# EAGLE board PCB (EAGLE 6.3)
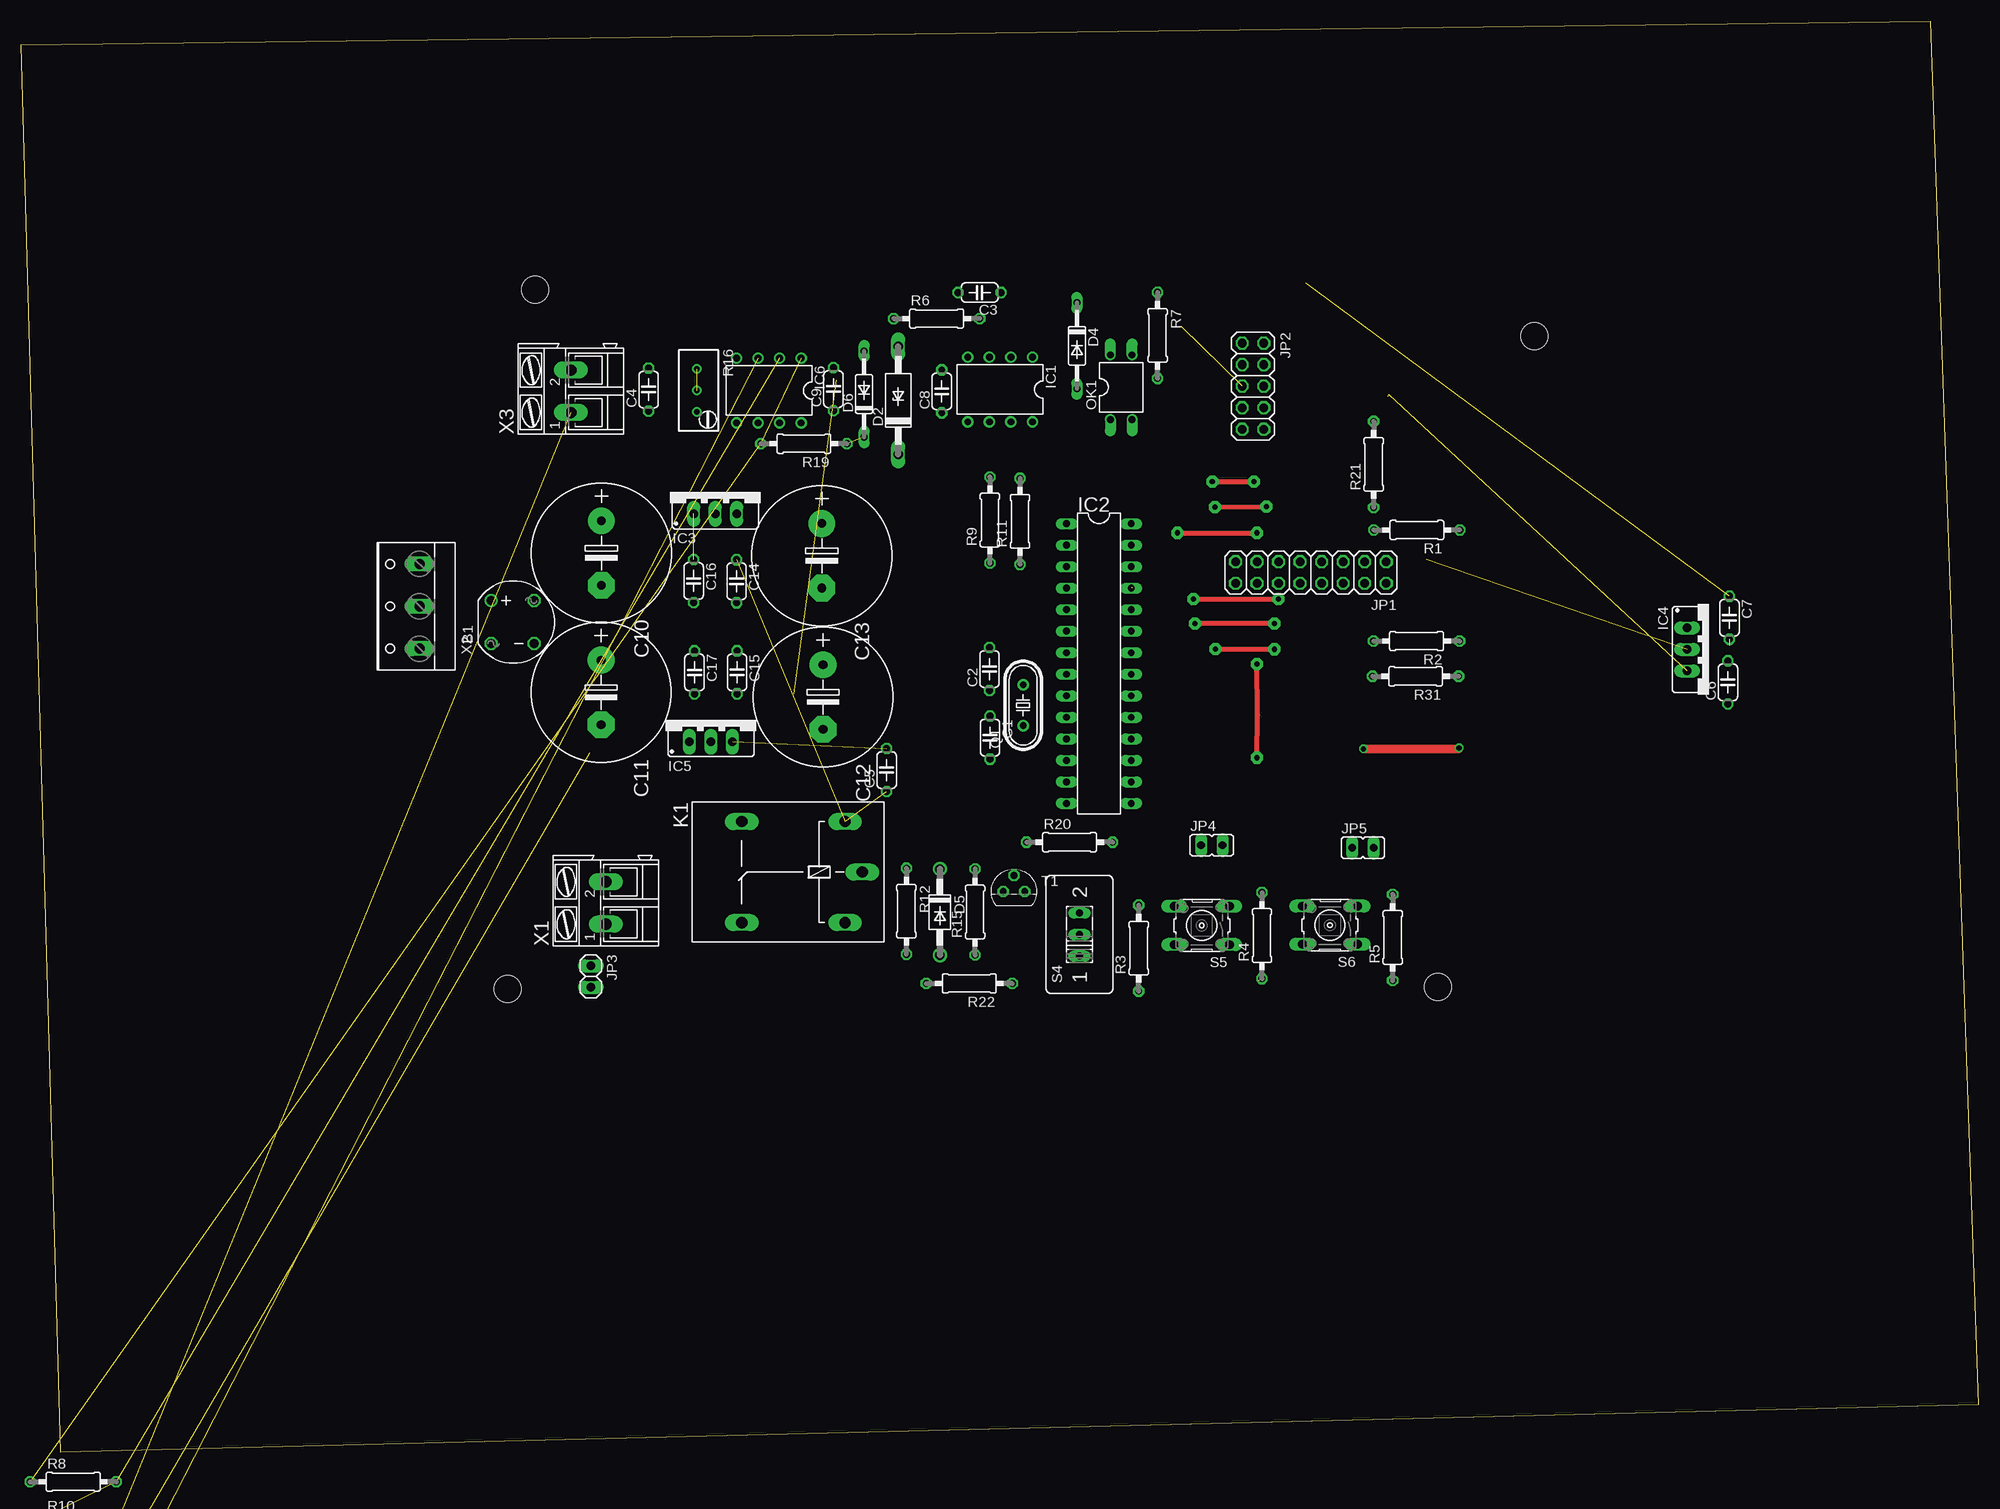
[diagram p0: board, top side]
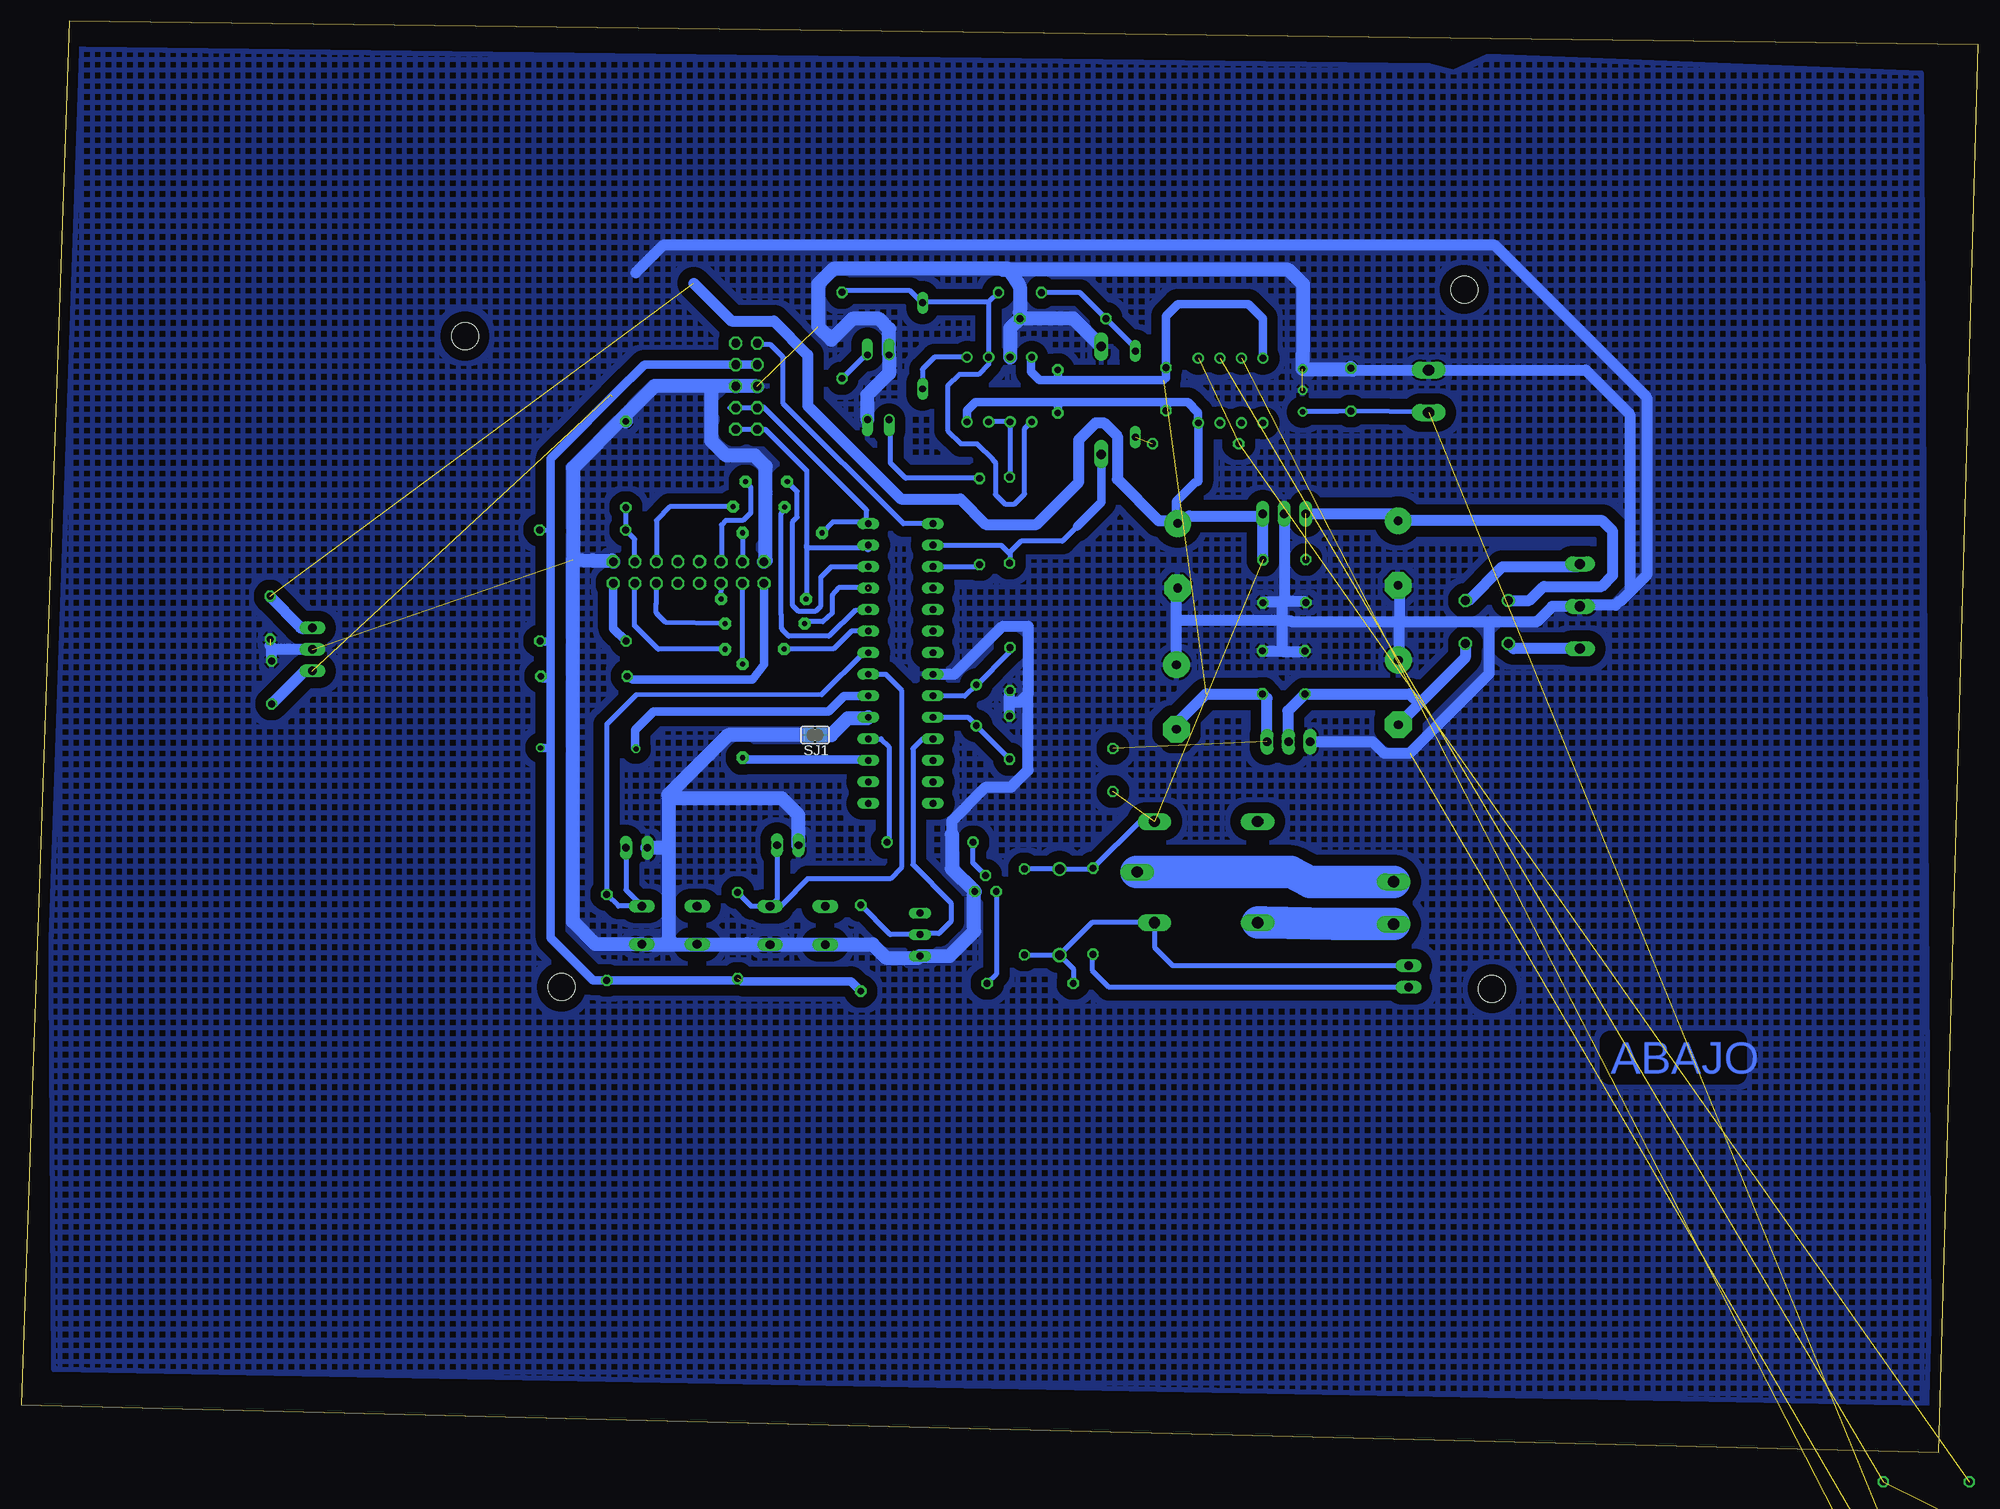
[diagram p1: board, bottom side, seen from below]

Size 230.97 x 168.91 mm. Coordinates in mm from the lower left corner, seen from the top.
Outline: 230.97,5.6 4.64,0 0,166.12 225.31,168.91 230.97,5.6
Copper layers (1*16): Top 0.035mm / dielectric 1.5mm / Bottom 0.035mm
Design rules "default *": minimum track width 20mil, minimum drill 24mil, track to track 15mil, track to pad 15mil, pad to pad 15mil, via to via 15mil, smd to smd 8mil, copper to edge 40mil, drill to drill 8mil, minimum pad ring 10mil, minimum via ring 8mil, stop-mask expansion 4mil, vias tented up to drill 0mil, thermal gap 10mil
Holes 3.2 mm at 167.22,54.93 178.6,131.74 60.68,137.24 57.39,54.71

## Footprints (pad centres in the part's own frame; a part is rotated, then mirrored left to right if it is on the bottom)
RB1A = drill 1.016: + -2.54,2.54 | drill 1.016 octagon: - 2.54,-2.54; AC1 2.54,2.54; AC2 -2.54,-2.54
C050-024X044 = drill 0.813 octagon: 1 -2.54,0; 2 2.54,0
E7,5-16 = drill 1.016 pad 3.15: + -3.81,0 | drill 1.016 pad 3.15 octagon: - 3.81,0
P1Z12 = drill 1.118 long: A 6.35,0; C -6.35,0
DO35-10 = drill 0.813 long: A 5.08,0; C -5.08,0
DO41-10 = drill 1.118: A 5.08,0; C -5.08,0
DIL08 = drill 0.813 pad 1.27: 1 -3.81,-3.81; 2 -1.27,-3.81; 3 1.27,-3.81; 4 3.81,-3.81; 5 3.81,3.81; 6 1.27,3.81; 7 -1.27,3.81; 8 -3.81,3.81
DIL28-3 = drill 0.813 long: 1 -16.51,-3.81; 2 -13.97,-3.81; 3 -11.43,-3.81; 4 -8.89,-3.81; 5 -6.35,-3.81; 6 -3.81,-3.81; 7 -1.27,-3.81; 8 1.27,-3.81; 9 3.81,-3.81; 10 6.35,-3.81; 11 8.89,-3.81; 12 11.43,-3.81; 13 13.97,-3.81; 14 16.51,-3.81; 15 16.51,3.81; 16 13.97,3.81; 17 11.43,3.81; 18 8.89,3.81; 19 6.35,3.81; 20 3.81,3.81; 21 1.27,3.81; 22 -1.27,3.81; 23 -3.81,3.81; 24 -6.35,3.81; 25 -8.89,3.81; 26 -11.43,3.81; 27 -13.97,3.81; 28 -16.51,3.81
78XXS = drill 1.016 long: GND 0,-2.54; IN -2.54,-2.54; OUT 2.54,-2.54
79XXS = drill 1.016 long: GND -2.54,-2.54; IN 0,-2.54; OUT 2.54,-2.54
2X08 = drill 1.016 octagon: 1 -8.89,-1.27; 2 -8.89,1.27; 3 -6.35,-1.27; 4 -6.35,1.27; 5 -3.81,-1.27; 6 -3.81,1.27; 7 -1.27,-1.27; 8 -1.27,1.27; 9 1.27,-1.27; 10 1.27,1.27; 11 3.81,-1.27; 12 3.81,1.27; 13 6.35,-1.27; 14 6.35,1.27; 15 8.89,-1.27; 16 8.89,1.27
2X05 = drill 1.016 octagon: 1 -5.08,-1.27; 2 -5.08,1.27; 3 -2.54,-1.27; 4 -2.54,1.27; 5 0,-1.27; 6 0,1.27; 7 2.54,-1.27; 8 2.54,1.27; 9 5.08,-1.27; 10 5.08,1.27
1X02 = drill 1.016 long: 1 -1.27,0; 2 1.27,0
JP1 = drill 0.914 long: 1 0,-1.27; 2 0,1.27
G5LE = drill 1.321 long: 1 -7.493,-5.969; 2 -7.493,5.969; O 4.699,5.969; P -9.525,0; S 4.699,-5.969
DIL04 = drill 0.813 offset: 1 -1.27,-3.81; 2 1.27,-3.81; 3 1.27,3.81; 4 -1.27,3.81
HC49/S = drill 0.813: 1 -2.413,0; 2 2.413,0
0207/10 = drill 0.813 octagon: 1 -5.08,0; 2 5.08,0
RTRIMT93YA = drill 0.61: 1 0,-2.54; 2 0,0; 3 0,2.54
M251 = drill 0.813 long: 1 -2.54,0; 2 0,0; 3 2.54,0
B3F-10XX = drill 1.016 long: 1 -3.251,2.261; 2 3.251,2.261; 3 -3.251,-2.261; 4 3.251,-2.261
SJ = smd 1.168 x 1.6: 1 -0.762,0; 2 0.762,0
TO92 = drill 0.813 octagon: 1 1.27,0; 2 0,1.905; 3 -1.27,0
AK300/2 = drill 1.321 long: 1 -2.515,0; 2 2.489,0
W237-103 = drill 1.194 long: 1 -5,-1.29; 2 0,-1.29; 3 5,-1.29

## Placement (x,y rotation side)
B1  Puente de 1A  [RB1A]  57.99,97.99 0 top
C1  27p  [C050-024X044]  114.33,84.35 270 top
C2  27p  [C050-024X044]  114.27,92.44 90 top
C3  22 nf  [C050-024X044]  113.11,136.89 180 top
C4  1 pf  [C050-024X044]  74.05,125.43 90 top
C5  100 nf  [C050-024X044]  102.14,80.52 90 top
C6  100 nf  [C050-024X044]  201.42,90.88 90 top
C7  330 nf  [C050-024X044]  201.6,98.5 270 top
C8  100 nf  [C050-024X044]  108.64,125.22 90 top
C9  100 nf  [C050-024X044]  95.86,125.48 90 top
C10  2200uf 25v  [E7,5-16]  68.47,106.13 270 top
C11  2200uf 25v  [E7,5-16]  68.44,89.69 270 top
C12  2200uf 25v  [E7,5-16]  94.63,89.13 270 top
C13  no  [E7,5-16]  94.49,105.81 270 top
C14  100 nf  [C050-024X044]  84.42,102.81 270 top
C15  100 nf  [C050-024X044]  84.48,92.06 270 top
C16  no  [C050-024X044]  79.36,102.84 270 top
C17  no  [C050-024X044]  79.45,92.05 270 top
D2  zener 5.1v  [P1Z12]  103.51,124.16 90 top
D4  1N4148DO35-10  [DO35-10]  124.6,130.6 270 top
D5  1N4001  [DO41-10]  108.43,63.76 270 top
D6  1N4148DO35-10  [DO35-10]  99.47,124.9 90 top
IC1  TL082  [DIL08]  115.52,125.43 180 top
IC2  PIC18F2550_28DIP  [DIL28-3]  127.19,93.1 270 top
IC3  7812  [78XXS]  81.91,113.31 0 top
IC4  7805  [78XXS]  199.16,94.76 270 top
IC5  7912  [79XXS]  81.4,86.42 0 top
IC6  TL082  [DIL08]  88.24,125.32 180 top
JP1  [2X08]  152.2,103.84 180 top
JP2  [2X05]  145.37,125.84 270 top
JP3  led  [1X02]  67.24,56.16 270 top
JP4  AUTOSET  [JP1]  140.5,71.66 270 top
JP5  RESET  [JP1]  158.34,71.36 270 top
K1  G5L  [G5LE]  89.74,68.48 180 top
OK1  LTV816  [DIL04]  129.82,125.71 0 top
Q1  20 mhz  [HC49/S]  118.25,88.18 90 top
R1  470  [0207/10]  164.71,108.86 180 top
R2  0  [0207/10]  164.67,95.75 180 top
R3  47k  [0207/10]  131.88,59.5 90 top
R4  47k  [0207/10]  146.43,60.99 90 top
R5  47k  [0207/10]  161.86,60.77 90 top
R6  10k  [0207/10]  108.03,133.81 0 top
R7  0  [0207/10]  134.11,131.83 270 top
R8  10k  [0207/10]  6.14,-3.48 0 top  (outside the outline)
R9  1k  [0207/10]  114.32,110.03 90 top
R10  10k  [0207/10]  6.14,-8.48 0 top  (outside the outline)
R11  680  [0207/10]  117.87,109.88 90 top
R12  1k  [0207/10]  104.46,63.87 270 top
R13  10k  [0207/10]  6.14,-13.48 0 top  (outside the outline)
R14  10k  [0207/10]  6.14,-18.48 0 top  (outside the outline)
R15  10k  [0207/10]  112.57,63.77 90 top
R16  1M  [RTRIMT93YA]  79.74,125.33 180 top
R19  100  [0207/10]  92.36,119.04 180 top
R20  4k7  [0207/10]  123.72,72.01 0 top
R21  330  [0207/10]  159.61,116.6 90 top
R22  100  [0207/10]  111.89,55.34 180 top
R31  470  [0207/10]  164.56,91.59 180 top
S4  PRESICION  [M251]  124.89,61.12 90 top
S5  AUTOSETEO  [B3F-10XX]  139.34,62.19 180 top
S6  RESET  [B3F-10XX]  154.45,62.22 180 top
SJ1  [SJ]  137.28,84.66 180 bottom
T1  BC548  [TO92]  117.16,66.18 0 top
X1  [AK300/2]  68.99,64.86 90 top
X2  FUENTE  [W237-103]  45.72,99.85 90 top
X3  [AK300/2]  64.87,125.24 90 top

## Library data of the parts
B1 = rectifier
C1-C17 = rcl
D2 D4-D6 = diode
IC1 IC6 = linear
IC2 = microchip
IC3-IC5 = v-reg
JP1-JP3 = pinhead
JP4 JP5 SJ1 = jumper
K1 = relay
OK1 = optocoupler; OC_FARNELL: unknown; OC_NEWARK: unknown
Q1 = crystal
R1-R16 R19-R22 R31 = resistor
S4 = switch
S5 S6 = switch-omron
T1 = transistor
X1 X3 = con-ptr500
X2 = con-wago-500

## Nets
+5V: C6.1 IC2.20 IC4.OUT JP2.3 JP2.4 R1.1 R2.1 R3.1 R4.1 R5.1 R31.1
+12V: C5.1 C7.1 C8.1 C9.1 C13.+ C14.1 D5.C IC1.8 IC3.OUT IC4.IN IC6.8 K1.1 R12.1 R15.2
-12V: C5.2 C8.2 C9.2 C12.- C15.2 IC1.4 IC5.OUT IC6.4
GND: C1.1 C2.1 C4.2 C6.2 C7.2 C10.- C11.+ C12.+ C13.- C14.2 C15.1 C16.2 C17.1 D2.A IC1.3 IC2.8 IC3.GND IC4.GND IC5.GND JP1.1 JP1.15 JP2.5 JP2.6 JP4.1 JP5.1 OK1.2 OK1.4 R6.2 R13.2 R14.1 R16.1 R16.2 R21.2 S4.1 S5.1 S6.1 SJ1.2 T1.1 X2.2 X3.2
N$1: IC6.3 R13.1 R14.2
N$2: JP1.3 R1.2 R21.1
N$3: D6.C R19.1
N$4: JP1.2 R2.2
N$5: JP1.16 R31.2
N$6: C3.2 D6.A R6.1
N$7: IC6.2 R8.2 R10.1
N$8: IC2.23 JP1.4
N$9: IC2.24 JP1.5
N$10: IC2.25 JP1.6
N$11: IC2.26 JP1.11
N$12: IC2.27 JP1.12 JP2.9 JP2.10
N$13: IC2.11 R3.2 S4.2
N$14: IC2.21 JP4.2 R4.2 S5.3
N$15: IC2.22 JP5.2 R5.2 S6.3
N$16: JP3.2 R12.2
N$17: IC2.28 JP1.13 JP2.7 JP2.8
N$18: IC2.19 SJ1.1
N$19: IC2.17 JP1.14
N$20: C3.1 D4.C IC1.2 IC1.5 R7.1
N$21: IC6.1 R8.1 R19.2
N$22: D4.A IC1.1
N$23: IC2.1 JP2.1
N$24: C2.2 IC2.9 Q1.2
N$25: C1.2 IC2.10 Q1.1
N$26: B1.+ C10.+ C16.1 IC3.IN
N$27: OK1.1 R11.2
N$28: OK1.3 R7.2
N$29: IC1.6 IC1.7 R9.2
N$30: K1.P X1.2
N$31: B1.- C11.- C17.2 IC5.IN
N$32: B1.AC2 X2.1
N$33: B1.AC1 X2.3
N$34: K1.O X1.1
N$35: IC2.18 R20.2
N$36: D5.A JP3.1 K1.2 R15.1 R22.2
N$39: D2.C IC2.2 R9.1
N$40: IC2.3 R11.1
N$45: R22.1 T1.3
N$51: C4.1 R10.2 R16.3 X3.1
N$55: R20.1 T1.2

## Tracks (layer width: path | path; a pad name or v marks a point on that pad's centre or on a via)
+5V  (via drill 0.6 pad 0.81)  (3 unrouted)
  Top 1.016: v158.42,83.02 169.58,83.02 v169.7,83.14
  Bottom 0.61: R1.1 168.66,108.86 168.48,108.68
  Bottom 1.016: 168.48,82.92 168.48,60.7 163.5,55.72 161.89,55.72 R5.1 146.03,55.69 145.94,55.6 133.06,55.6 R3.1 | 168.48,82.92 168.48,91.34 | 168.48,91.34 168.48,95.7 | IC2.20 131.03,89.26 133.84,89.26 135.66,87.44 156.34,87.44 158.54,85.24 158.54,83.14 v158.42,83.02 | R2.1 169.7,95.7 168.48,95.7 | R31.1 169.39,91.34 168.48,91.34 | 168.48,95.7 168.48,108.68 168.48,117.3 166.7,119.08 161.21,124.59 160.86,124.94 157.43,128.38 JP2.4 JP2.3 | v169.7,83.14 168.7,83.14 168.48,82.92
  Bottom 1.27: IC4.OUT 197.53,92.22 C6.1
+12V  (3 unrouted)
  Bottom 0.61: R15.2 108.44,68.85 D5.C 104.57,68.84 R12.1 98.96,74.45 K1.1
  Bottom 1.016: IC1.8 119.33,122.95 118.34,123.94 108.8,123.94 | 108.8,123.94 96.04,123.94 | 96.04,123.94 93.3,123.94 92.08,122.72 92.08,121.54 IC6.8 92.05,114.61 92.14,114.52 92.36,114.52 94.68,112.21 94.68,109.81 C13.+ | 95.86,123.76 96.04,123.94 | C8.1 108.64,123.78 108.8,123.94
  Bottom 1.27: C14.1 84.43,110.75 IC3.OUT 84.71,110.52 93.14,110.52 94.04,109.62 C13.+ 94.83,109.96 96.73,109.96 101.61,114.84 101.61,119.92 103.21,121.52 104.14,121.52 106.14,119.52 106.14,114.52 111.14,109.52 117.14,109.52 120.14,112.52 127.14,112.52 138.14,123.52 138.14,129.52 142.14,133.52 147.14,133.52 151.6,137.98 | C7.1 201.6,100.98 198.14,97.52 198.14,97.49 197.88,97.23 196.69,97.23 IC4.IN | C9.1 95.86,123.76
-12V  (2 unrouted)
  Bottom 1.016: 108.48,126.52 96.14,126.52 95.86,126.8 C9.2 95.85,134.13 94.46,135.52 86.14,135.52 84.43,133.82 IC6.4 | 108.48,126.52 110.8,126.52 111.8,127.52 111.8,129.16 IC1.4 | C8.2 108.64,126.68 108.48,126.52
  Bottom 1.27: C12.- 94.63,86.03 91.14,89.52 C15.2 83.94,88.98 IC5.OUT
GND  (6 unrouted)
  Bottom 0.61: SJ1.2 138.32,84.66 | S5.1 145.31,59.93 145.34,59.96
  Bottom 1.27: IC3.GND 81.91,100.49 | 81.91,100.49 81.88,100.45 79.52,100.45 C16.2 | C14.2 84.43,100.28 84.31,100.4 82,100.4 | 82,100.4 81.91,100.49 | C15.1 82.22,94.6 82.14,94.52 | 82.14,94.52 82.14,98.15 | 82.14,98.15 82.14,100.26 82,100.4 | 82.14,94.52 79.53,94.52 C17.1 | 57.48,98.02 52.11,98.02 50.28,99.85 X2.2 46.86,99.99 42.83,99.99 42.3,100.52 42.14,100.52 41.14,101.52 | 57.48,98.02 68.27,98.02 68.27,98.48 | 68.27,98.48 68.27,102.12 C10.- | C11.+ 68.44,93.56 68.32,93.67 68.32,97.81 68.12,98.02 | 68.27,98.48 68.32,98.42 68.32,98.22 68.12,98.02 | 68.12,98.02 81.01,98.02 81.14,98.15 82.14,98.15 | C12.+ 94.63,98.52 | 94.63,98.52 94.63,101.86 C13.- | 82.14,98.15 94.26,98.15 94.63,98.52 | IC5.GND 71.5,83.88 70.14,82.52 67.11,82.52 57.73,91.91 57.73,97.78 57.48,98.02 | IC4.GND 201.14,94.76 | 201.14,94.76 201.42,94.76 201.44,94.75 201.44,93.44 C6.2 | 201.6,95.23 201.14,94.76 | C1.1 114.33,88.52 | 114.33,88.52 114.33,89.84 C2.1 | IC2.8 120.83,91.83 115.14,97.52 112.14,97.52 112.14,89.52 | 112.14,89.52 113.14,88.52 114.33,88.52 | 121.12,72.96 121.12,74.54 117.14,78.52 114.14,78.52 112.14,80.52 112.14,89.52 | 158.44,139.23 155.14,142.52 57.14,142.52 39.14,124.52 39.14,103.52 41.14,101.52 | 41.14,101.52 41.14,122.52 46.34,127.73 X3.2 73.81,127.73
  Bottom 1.676: 154.3,59.96 S6.1 163.17,59.96 165.86,62.64 165.86,105.36 | 154.3,59.96 153.96,59.96 | 153.96,59.96 145.34,59.96 130.47,59.96 128.9,58.38 125.09,58.38 S4.1 121.44,58.58 118.52,61.5 118.52,66.09 T1.1 121.12,68.87 121.12,72.96 | R6.2 113.1,134.56 113.1,137.56 114.48,139.68 115.16,139.68 | R6.2 114.25,132.67 IC1.3 | R6.2 106.8,133.81 D2.A | OK1.2 131.12,121.93 131.12,124.78 128.55,127.35 OK1.4 128.55,132.59 129.74,133.78 132.86,133.78 135.34,131.3 136.92,132.88 136.92,137.88 135.12,139.68 115.16,139.68 | 161.26,105.28 JP1.1 161.25,105.26 163.52,105.26 165.86,105.36 | JP2.5 JP2.6 149.5,125.84 | 149.5,125.84 156.2,125.84 159.79,122.25 | 165.86,105.36 165.86,116.18 159.79,122.25 | JP1.15 143.12,105.3 143.12,116.36 144.4,117.64 147.78,117.64 149.5,119.36 149.5,125.84 | 115.16,139.68 115.06,139.58 81.42,139.58 79.7,137.86 79.7,131.83 R16.1 74.14,127.87 C4.2 73.81,127.73 | 154.48,60.14 154.3,59.96 | 154.36,77.82 149.78,82.4 149.78,82.42 147.54,84.66 138.32,84.66 | 154.36,77.82 154.58,77.6 154.58,71.64 | 154.58,71.64 154.58,60.58 153.96,59.96 | R21.2 159.61,122.07 159.79,122.25 | JP4.1 139.23,75.21 141.2,77.18 153.64,77.18 153.94,77.48 154.02,77.48 154.36,77.82 | JP5.1 154.86,71.36 154.58,71.64
  pour Bottom (isolate 1.27, hatched): 57.82,164.84 6.76,162.84 5.76,5.72 227.12,9.72 228.12,165.72 64.88,163.72 61.88,162.92
N$1  (2 unrouted)
N$2
  Bottom 0.61: JP1.3 158.55,107.79 R1.2 159.61,108.88 R21.1
N$3  (1 unrouted)
N$4
  Bottom 1.016: R2.2 161.09,97.26 JP1.2
N$5
  Bottom 1.016: R31.2 158.79,91.22 144.68,91.22 143.27,92.97 JP1.16
N$6
  Bottom 0.61: C3.2 106.04,136.89 R6.1 99.47,130.33 D6.A
N$7  (2 unrouted)
N$8  (via drill 0.6 pad 1.42)  (1 unrouted)
  Top 0.61: v140.94,94.82 140.98,94.78 v147.9,94.78
  Bottom 0.61: JP1.4 158.58,102.54 158.58,97.56 155.8,94.78 v147.9,94.78 | 131.01,96.92 133,96.92 135.1,94.82 v140.94,94.82
N$9  (via drill 0.6 pad 1.42)
  Top 0.61: v140.86,111.56 v146.94,111.6
  Bottom 0.61: v140.86,111.56 141.16,110.96 141.16,110.92 141.28,110.8 141.28,98.84 141.26,98.82 141.26,97.28 141.16,97.18 141.16,97.1 140.38,96.32 135.64,96.32 132.57,99.33 IC2.24 | v146.94,111.6 154.42,111.6 156,110.02 JP1.5
N$10  (via drill 0.6 pad 1.42)  (1 unrouted)
  Top 0.61: v147.88,97.82 v138.52,97.84
  Bottom 0.61: JP1.6 156.01,100.18 156.02,100.17 156.02,99.1 155.92,99 155.92,98.96 154.9,97.94 v147.88,97.82 | 131.07,102.06 134.48,102.06 135.26,101.16 135.26,99 136.34,98.04 138.32,98.04 v138.52,97.84
N$11  (via drill 0.6 pad 1.42)
  Top 0.61: v140.56,114.56 v145.48,114.56
  Bottom 0.61: 131.05,104.58 131.78,104.58 | v140.56,114.56 139.4,113.4 139.4,110.36 139.92,109.84 139.92,99.92 139.3,99.3 137.18,99.3 136.58,99.9 136.58,103.3 135.34,104.54 131.01,104.54 IC2.26 | v145.48,114.56 145.48,114.52 144.88,113.92 144.88,110.88 145.78,109.98 147.82,109.98 148.34,109.46 148.34,105.16 JP1.11
  Bottom 1.016: IC2.26 131.05,104.58
N$12  (via drill 0.6 pad 1.42)
  Top 0.61: v138.34,100.72 v148.38,100.7
  Bottom 0.61: JP2.10 JP2.9 143.15,120.76 138.28,115.88 138.28,107.12 | v148.38,100.7 148.34,102.52 JP1.12 | 138.28,107.12 138.28,102 v138.34,100.72 | 131.03,106.7 138.26,106.7 138.28,107.12
  Bottom 1.016: IC2.27 131.03,106.7
N$13
  Bottom 0.61: R3.2 128.42,61.12 S4.2 124.79,61.22 122.66,61.22 121.24,62.64 121.24,64.86 125.74,69.36 125.74,83.04 124.57,84.21 IC2.11
N$14
  Bottom 0.61: IC2.21 128.95,91.83 127.08,89.96 127.08,69 128.38,67.7 138.18,67.7 139.6,66.28 139.6,66.2 141.32,64.48 142.56,64.48 S5.3 | S5.3 144.8,64.45 R4.2 | JP4.2 141.77,65.27 S5.3
N$15
  Bottom 0.61: IC2.22 131.03,94.34 131.62,94.3 136.5,89.42 158.38,89.4 161.86,85.92 R5.2 160.49,64.48 S6.3 159.61,66.39 JP5.2
N$16
  Bottom 0.61: JP3.2 102.59,54.89 104.52,56.82 104.52,58.73 R12.2
N$17  (via drill 0.6 pad 1.42)
  Top 0.61: v136.48,108.52 v145.82,108.52
  Bottom 0.61: JP2.8 147.36,123.3 147.35,123.3 JP2.7 144.03,123.36 143.38,123.36 131.2,111.18 131.2,109.81 135.19,109.81 v136.48,108.52 | v145.82,108.52 145.82,105.14 JP1.13
  Bottom 1.016: IC2.28 131.2,109.81
N$18
  Bottom 0.61: 135.94,84.68 136.5,84.68 SJ1.1
  Bottom 1.676: IC2.19 131.11,86.64 133.4,86.64 135.38,84.66 135.92,84.66 135.94,84.68
N$19  (via drill 0.6 pad 1.42)
  Top 0.61: v145.86,81.98 145.9,87.06 v145.82,93.06
  Bottom 0.61: IC2.17 131.09,81.76 | v145.82,93.06 145.85,99.49 JP1.14
  Bottom 1.016: 131.09,81.76 145.68,81.78 v145.86,81.98
N$20
  Bottom 0.61: C3.1 116.79,135.75 | 116.79,135.75 IC1.2 116.79,128.43 118.02,127.2 120.26,127.2 121.62,125.84 121.62,120.6 120.06,119.04 118.14,119.04 116.3,117.2 116.3,117.12 116,116.82 116,113.06 114.88,111.94 113.72,111.94 112.54,113.12 112.54,120.8 IC1.5 | 116.79,135.75 124.52,135.75 D4.C 124.66,135.68 126.06,137.08 133.94,137.08 R7.1
N$21  (2 unrouted)
N$22
  Bottom 0.61: IC1.1 123.2,129.25 124.62,127.82 124.62,125.54 D4.A
N$23
  Bottom 0.61: IC2.1 126.87,109.61 141.04,123.78 141.04,129.24 142.52,130.72 143.9,130.72 JP2.1
N$24
  Bottom 0.61: IC2.9 119.6,89.24 Q1.2 118.19,90.59 114.32,94.46 114.32,94.94 C2.2
N$25
  Bottom 0.61: IC2.10 119.19,86.7 Q1.1 118.25,85.73 C1.2
N$26  (1 unrouted)
  Bottom 1.27: IC3.IN 69.3,110.77 C10.+ 44.37,109.95 43.14,108.72 43.14,103.52 44.46,102.21 51.26,102.21 51.43,102.04 51.49,102.04 52.99,100.53 B1.+
N$27
  Bottom 0.61: R11.2 126.59,114.96 128.4,116.76 128.4,121.75 OK1.1
N$28
  Bottom 0.61: OK1.3 131.34,129.52 R7.2
N$29
  Bottom 0.61: IC1.7 IC1.6 114.25,115.18 R9.2
N$30
  Bottom 3.81: X1.2 78.88,67.35 81.1,68.48 99.33,68.48 K1.P
N$31
  Bottom 1.27: B1.- 60.53,93.79 65.97,88.35 | 65.97,88.35 C11.- | 65.97,88.35 67.13,89.51 C17.2 79.46,89.52 79.48,89.52 81.48,87.52 81.48,83.97 IC5.IN
N$32
  Bottom 1.27: X2.1 54.85,94.85 B1.AC2
N$33
  Bottom 1.27: B1.AC1 60.13,100.53 56.14,104.52 47.34,104.52 X2.3
N$34
  Bottom 3.81: K1.O 84.25,62.56 76.02,62.34 X1.1
N$35
  Bottom 0.61: IC2.18 129.47,84.21 128.56,83.3 128.56,72.25 R20.2
N$36
  Bottom 0.61: R15.1 D5.A | D5.A 106.81,57.06 R22.2 | JP3.1 95.05,57.43 97.14,59.52 97.14,62.42 K1.2 104.6,62.52 D5.A
N$39
  Bottom 0.61: 106.39,109.26 108.1,107.54 112.96,107.54 114.26,106.24 114.26,106 | 114.26,106 114.26,105.01 R9.1 | IC2.2 115.33,107.07 114.26,106
  Bottom 1.016: 106.39,109.26 103.51,112.14 D2.C
N$40
  Bottom 0.61: IC2.3 118.14,104.53 R11.1
N$45
  Bottom 0.61: T1.3 115.89,56.42 R22.1
N$51  (1 unrouted)
  Bottom 0.61: X3.1 64.93,122.79 C4.1 75.63,122.83 79.7,122.83 R16.3
N$55
  Bottom 0.61: T1.2 118.64,69.57 R20.1

## Text on the board
Bottom: ABAJO
tValues: GND / PIEZO | 1_ICSP | + PIEZO | CRECIMIENTO / ANTIHORARIO | 1_LCD | -12v | GND | +12v | PRESICION 5% | RELE / NC | GND LED | + LED | PRESICION 3%